# EAGLE board B (EAGLE 6.6.0)
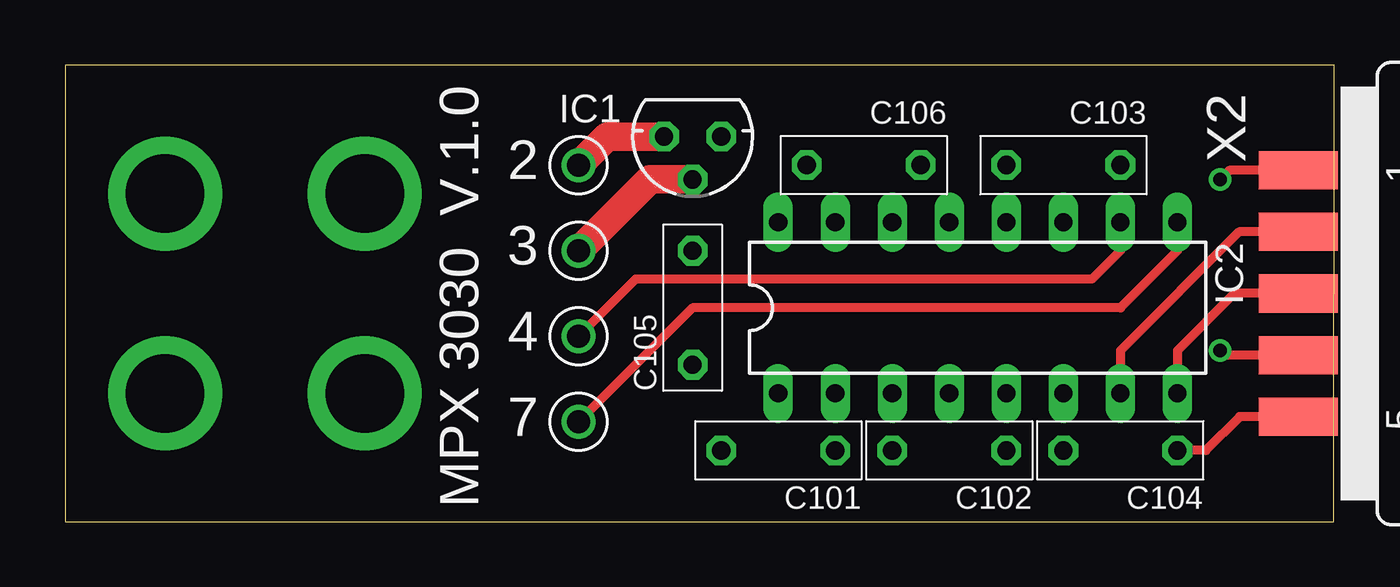
[diagram p0: board, top side]
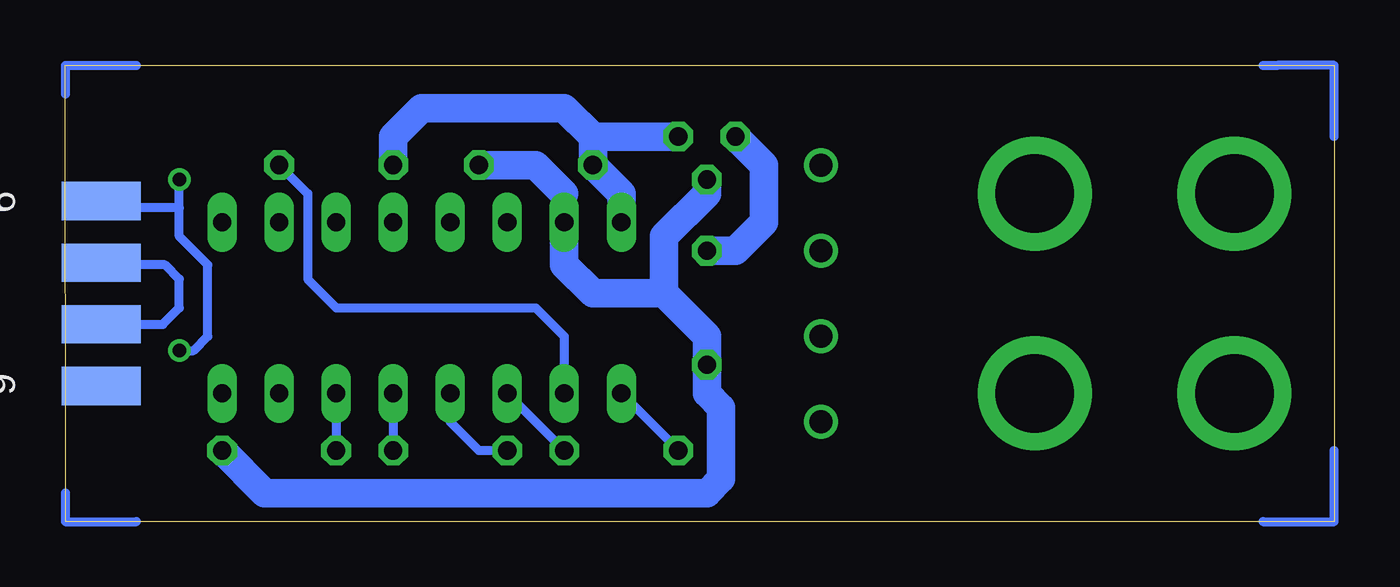
[diagram p1: board, bottom side, seen from below]

Size 56.52 x 20.32 mm. Coordinates in mm from the lower left corner, seen from the top.
Outline: 0,0 56.49,0 56.52,20.32 0,20.32 0,0
Copper layers (1*16): Top 0.035mm / dielectric 1.5mm / Bottom 0.035mm
Design rules "default": minimum track width 10mil, minimum drill 24mil, track to track 8mil, track to pad 8mil, pad to pad 8mil, via to via 8mil, smd to smd 8mil, copper to edge 40mil, drill to drill 8mil, minimum pad ring 10mil, minimum via ring 8mil, stop-mask expansion 4mil, vias tented up to drill 0mil, thermal gap 10mil

## Footprints (pad centres in the part's own frame; a part is rotated, then mirrored left to right if it is on the bottom)
TP_10 = drill 1.016: P$1 0,0
C050-025X075 = drill 0.813 octagon: 1 -2.54,0; 2 2.54,0
78LXX = drill 0.813 octagon: GND 0,1.905; IN 1.27,0; OUT -1.27,0
DIL16 = drill 0.813 long: 1 -8.89,-3.81; 2 -6.35,-3.81; 3 -3.81,-3.81; 4 -1.27,-3.81; 5 1.27,-3.81; 6 3.81,-3.81; 7 6.35,-3.81; 8 8.89,-3.81; 9 8.89,3.81; 10 6.35,3.81; 11 3.81,3.81; 12 1.27,3.81; 13 -1.27,3.81; 14 -3.81,3.81; 15 -6.35,3.81; 16 -8.89,3.81
TP_35 = drill 3.5 pad 5.08: TP_35 0,0
F09D = smd 1.7 x 3.5: 1 -5.486,-6.045; 2 -2.743,-6.045; 3 0,-6.045; 4 2.743,-6.045; 5 5.486,-6.045 | smd 1.7 x 3.5 bottom: 6 -4.115,-6.045; 7 -1.372,-6.045; 8 1.372,-6.045; 9 4.115,-6.045

## Placement (x,y rotation side)
2  [TP_10]  22.86,15.88 0 top
3  [TP_10]  22.86,12.06 0 top
4  [TP_10]  22.86,8.26 0 top
7  [TP_10]  22.86,4.45 0 top
C101  100n  [C050-025X075]  31.75,3.17 180 top
C102  [C050-025X075]  39.37,3.17 180 top
C103  [C050-025X075]  44.45,15.88 180 top
C104  [C050-025X075]  46.99,3.17 0 top
C105  [C050-025X075]  27.94,9.53 90 top
C106  [C050-025X075]  35.56,15.88 180 top
IC1  78L05  [78LXX]  27.94,17.14 180 top
IC2  MAX3232CPE  [DIL16]  40.64,9.53 0 top
U$1  [TP_35]  4.45,14.61 0 top
U$2  [TP_35]  13.34,14.61 0 top
U$3  [TP_35]  4.45,5.71 0 top
U$4  [TP_35]  13.34,5.71 0 top
X2  [F09D]  60.96,10.16 270 top

## Library data of the parts
2-4 7 U$1-U$4 = SUPPLY
C101-C106 = R-C
IC1 = v-reg
IC2 = maxim; MF: MAXIM; MPN: MAX3232CPE+; OC_FARNELL: 9724494; OC_NEWARK: 68K4626
X2 = con-subd; OC_FARNELL: unknown; OC_NEWARK: unknown

## Nets
+5V: C103.2 C106.2 IC1.OUT IC2.16
A_CABLE_PIN_7: 7.P$1 IC2.9
A_DSUB: IC2.8 X2.3
B_CABLE_PIN_4: 4.P$1 IC2.10
B_DSUB: IC2.7 X2.2
CABLE_PIN_2: 2.P$1 C105.2 IC1.IN
GND: 3.P$1 C104.2 C105.1 C106.1 IC1.GND IC2.15 X2.5
N$2: X2.7 X2.8
N$3: X2.1 X2.4 X2.6
N$21: C101.2 IC2.1
N$22: C101.1 IC2.3
N$23: C102.2 IC2.4
N$24: C102.1 IC2.5
N$25: C103.1 IC2.2
N$26: C104.1 IC2.6

## Tracks (layer width: path | path; a pad name or v marks a point on that pad's centre or on a via)
+5V
  Bottom 1.27: IC1.OUT 33.02,17.14 | IC2.16 31.75,14.61 C106.2 33.02,17.14 | 33.02,17.14 34.29,18.41 40.64,18.41 41.91,17.14 C103.2
A_CABLE_PIN_7
  Top 0.406: IC2.9 49.53,12.06 46.99,9.53 27.94,9.53 7.P$1
A_DSUB
  Top 0.406: X2.3 52.07,10.16 49.53,7.62 IC2.8
B_CABLE_PIN_4
  Top 0.406: IC2.10 46.99,12.06 45.72,10.79 25.4,10.79 4.P$1
B_DSUB
  Top 0.406: X2.2 52.27,12.9 46.99,7.62 IC2.7
CABLE_PIN_2
  Top 1.27: 2.P$1 24.13,17.14 IC1.IN
  Bottom 1.27: IC1.IN 25.4,15.88 25.4,13.34 26.67,12.06 C105.2
GND
  Top 0.406: X2.5 52.3,4.67 50.8,3.17 C104.2
  Top 1.27: IC1.GND 26.04,15.24 3.P$1
  Bottom 0.406: 34.29,14.61 IC2.15
  Bottom 1.27: C106.1 35.56,15.88 34.29,14.61 | IC2.15 34.29,11.43 33.02,10.16 29.84,10.16 | 29.84,10.16 27.94,8.26 C105.1 27.94,5.71 27.3,5.08 27.3,1.91 27.94,1.27 47.62,1.27 C104.2 | IC1.GND 27.94,14.61 29.84,12.7 29.84,10.16
N$1
  Bottom 0.406: 0,17.14 0,20.32 2.54,20.32 3.18,20.32 | 0,3.17 0,0 3.18,0 | 53.34,20.32 56.52,20.32 56.52,19.05 | 53.34,0 56.52,0 56.52,1.27
N$2
  Bottom 0.406: X2.8 52.17,8.79 51.44,9.53 51.44,10.79 52.07,11.43 54.81,11.43 X2.7
N$3  (via drill 0.6)
  Top 0.406: X2.4 51.44,7.42 v51.44,7.62 | X2.1 51.84,15.65 v51.44,15.24
  Bottom 0.406: v51.44,7.62 50.8,7.62 50.16,8.26 50.16,11.43 51.44,12.7 51.44,13.97 | 51.44,13.97 54.61,13.97 X2.6 | 51.44,13.97 v51.44,15.24
N$21
  Bottom 0.406: IC2.1 C101.2
N$22
  Bottom 0.406: IC2.3 C101.1
N$23
  Bottom 0.406: IC2.4 39.37,4.45 38.1,3.17 C102.2
N$24
  Bottom 0.406: IC2.5 C102.1
N$25
  Bottom 0.406: C103.1 45.72,14.61 45.72,10.79 44.45,9.53 35.56,9.53 34.29,8.26 IC2.2
N$26
  Bottom 0.406: IC2.6 C104.1

## Text on the board
tNames: 2 | 3 | 4 | 7 | MPX 3030 V.1.0